# Altium PCB ALTAIR_PD_Soldier_V26.1c.PcbDoc (part 2 of 4)
Units mm, origin at the board's own origin, x right, y up, seen from the top; angles counter-clockwise.
Board outline 74 x 56 mm, 4 copper layers (Top Layer, Layer 1, Layer 2, Bottom Layer), stack 1.675 mm thick; 206 components, 124 nets, 616 pads, 540 vias.
Unrouted connection lines stored in the file: 139.
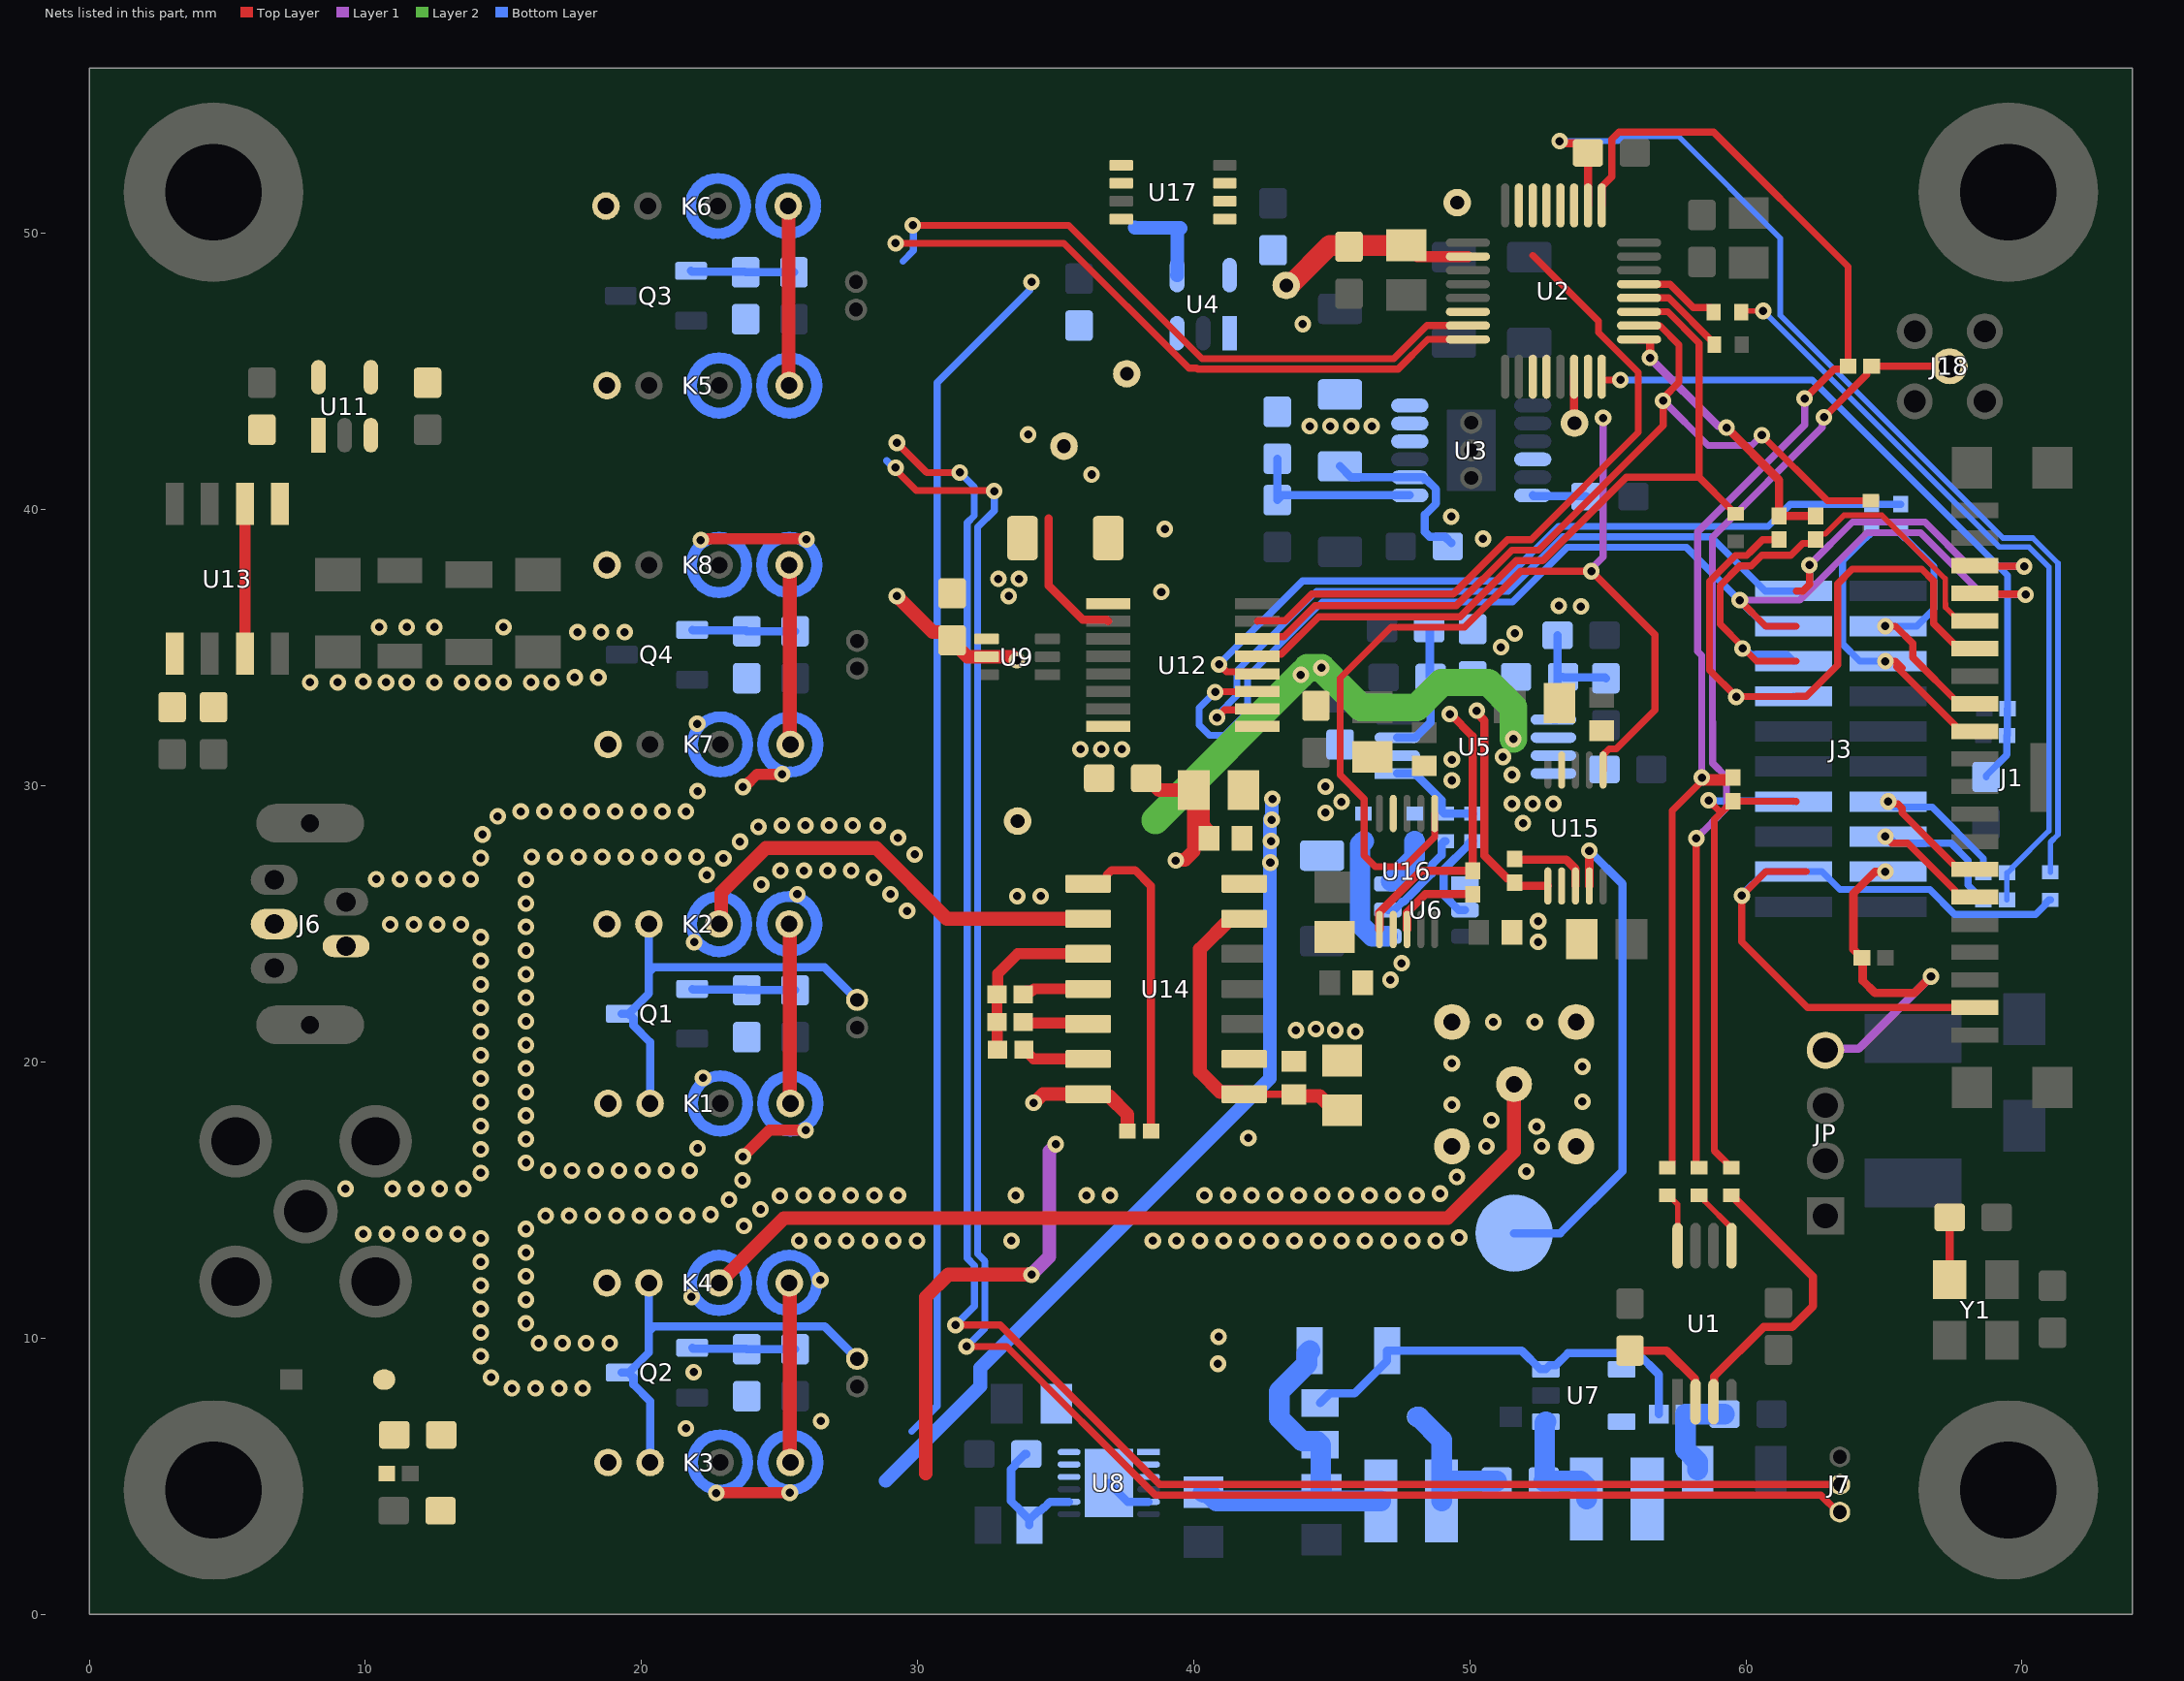
[diagram p4: the nets of this part, all layers, seen from the top]

## Part data
C00 C0: library part CAP, "Murata GRT188R61H105KE13D - Cap Ceramic 1uF 10% 50V X5R 0603 (Placeholder)", MF=Murata, MP=GRT188R61H105KE13D
C1 C2 C3 C4 C12 C23: library part CAP, "Murata GRT319R6YA106KE01D - Cap Ceramic 10uF 35V X5R 10% Pad SMD 1206 85C Automotive T/R", MF=Murata, MP=GRT319R6YA106KE01D
C5 C10 C11 C13 C22 C26 C27 C29 C32 C33 C35 C37 C39 C41 C43 C45 C47 C50 C51 C53 C54: library part CAP, "Kemet C0603C104K5RACAUTO - Cap Ceramic 0.1uF 50V X7R 10% 0603 125C Paper T/R", MF=Kemet, MP=C0603C104K5RACAUTO
C6 C8 C9 C15 C17 C25 C49: library part CAP, "Murata GRT188R61H105KE13D - Cap MLCC AEC-Q200 X5R 1uF 50V 0603", MF=Murata, MP=GRT188R61H105KE13D
C7 C14 C18 C19 C20 C24 C34 C36 C38 C40 C42 C44 C46 C48 C52: library part CAP, "Murata GRM21BR61E106KA73L - Cap Ceramic 10uF 10% 25V X5R 0805", MF=Murata, MP=GRM21BR61E106KA73L
C16: library part CAP, "Kemet C1206C331J5GACTU - Cap Ceramic 330pF 50V 5% NP0 1206", MF=Kemet, MP=C1206C331J5GACTU
C21: library part CAP, "Kemet C0805C475K8PACTU - Cap Ceramic 4.7uF 10V X5R 0805", MF=Kemet, MP=C0805C475K8PACTU
C28: library part CAP, "Murata GRT188R61H105KE13D - Cap MLCC AEEC-Q200 X5R 1uF 50V 0603", MF=Murata, MP=GRT188R61H105KE13D
C30: library part CAP, "Wurth Elektronik 885012008037 - Cap Ceramic 10pF 5% 50V NP0 1206", MF="Wurth Elektronik", MP=885012008037
C31: library part CAP, "Kemet C1206C301K5GACTU - Cap Ceramic 300pF 10% 50V NP0 1206", MF=Kemet, MP=C1206C301K5GACTU
C55 C56 C57 C58: library part CAP, "Cap, Nonpolar, Any, Must choose footprint manually"
D1: library part Schottky, "DIODE SCHOTTKY 20V 500MA SOD123", Average Rectified Current=500mA, Case/Package=SOD-123-2, Forward Voltage=385mV, Max Forward Surge Current (Ifsm)=5.5A, Max Operating Temperature=125°C, Max Repetitive Reverse Voltage (Vrrm)=20V, Max Reverse Leakage Current=250uA, Min Operating Temperature=-65°C, Package Quantity=3000, Contact Plating=Tin, Current Rating=500mA, Element Configuration=Single, Forward Current=500mA, Height=1.12mm, Lead Free="Lead Free", Length=2.69mm, Max Reverse Voltage (DC)=20V, Max Surge Current=5.5A, MF=onsemi, MP=MBR0520LT1G, Number of Pins=2, Output Current=500mA, Packaging="Tape and Reel", Peak Non-Repetitive Surge Current=5.5A, Peak Reverse Current=250uA, Polarity=Standard, Radiation Hardening=No, REACH SVHC="No SVHC", Termination=SMD/SMT, Voltage Rating (DC)=20V, Width=1.6mm
D2: library part LED-blue, "LED BLUE CLEAR 0603 SMD", Case Code (Imperial)=0603, Case Code (Metric)=1608, Color=Blue, Forward Current=30mA, Forward Voltage=3.2V, Max Operating Temperature=85°C, Min Operating Temperature=-40°C, Package Quantity=4000, Supplier Part Number 1=732-4966-1-ND, Test Current=20mA, Case/Package=0603, Category=LEDs, ComponentLink1Description=https://datasheet.ciiva.com/29563/150060bs75000-29563034.pdf?src-supplier=Digi-Key, ComponentLink1URL=https://datasheet.ciiva.com/29563/150060bs75000-29563034.pdf?src-supplier=Digi-Key, ComponentLink2Description=https://datasheet.ciiva.com/29279/759426-da-01-en-chipled-0603-w-kl-blau-150060bs75000-29279193.pdf?src-supplier=Conrad, ComponentLink2URL=https://datasheet.ciiva.com/29279/759426-da-01-en-chipled-0603-w-kl-blau-150060bs75000-29279193.pdf?src-supplier=Conrad, ComponentLink3Description=https://datasheet.ciiva.com/29563/150060bs75000-29563035.pdf?src-supplier=Digi-Key, ComponentLink3URL=https://datasheet.ciiva.com/29563/150060bs75000-29563035.pdf?src-supplier=Digi-Key, ComponentLink4Description=https://datasheet.ciiva.com/29563/150060bs75000-29563036.pdf?src-supplier=Digi-Key, ComponentLink4URL=https://datasheet.ciiva.com/29563/150060bs75000-29563036.pdf?src-supplier=Digi-Key, ComponentLink5Description=https://datasheet.ciiva.com/22656/1911343-22656939.pdf?src-supplier=Element14, ComponentLink5URL=https://datasheet.ciiva.com/22656/1911343-22656939.pdf?src-supplier=Element14, ComponentLink6Description=https://datasheet.ciiva.com/48430/150060bs75000-eng-tds-48430039.pdf?src-supplier=Distrelec, ComponentLink6URL=https://datasheet.ciiva.com/48430/150060bs75000-eng-tds-48430039.pdf?src-supplier=Distrelec, Dominant Wavelength=470nm, Height=0.7mm, Length=1.6mm, Lens Style=Clear,Rectangular, Luminous Intensity=145mcd, MF="Wurth Electronics", Mount="Surface Mount", MP=150060BS75000, Packaging="Cut Tape", REACH SVHC=Unknown, RoHS=Yes, Stock 1=66561, Supplier 1=Digi-Key, Viewing Angle=140°, Wavelength=470nm, Width=0.8mm
D3: library part Zener, "DIODE ZENER SOD123", MF=onsemi, MP=MMSZ4679T1G
D4: library part Zener, "Vishay SMAJ12A-M3/61 - TVS Diode 12V Standoff 13.3V Breakdown DO-214AC", MF="Vishay General Semiconductor", MP=SMAJ12A-M3/61
F1: library part Polyfuse, "Bel Fuse 0ZCG0030FF2C - Polymeric PTC Resettable Fuse 30V 300mA hold 600mA trip SMD 1812", MF="Bel Fuse Inc.", MP=0ZCG0030FF2C
H1 H2 H3 H4: "(Plated) Mounting hole"
J1: "20x1 Header SMD", Mouser Part Number=798-DF1920P1V52, Datasheet Link=https://www.hirose.com/en/product/document?clcode=CL0685-0037-0-52&productname=DF19-20P-1V(52)&series=DF19&documenttype=2DDrawing&lang=en&documentid=0001394451, Height=5.37mm, MF=Hirose, Mouser Price/Stock=https://www.mouser.co.uk/ProductDetail/Hirose-Connector/DF19-20P-1V52?qs=QNEnbhJQKvayaXitD7MtBA%3D%3D, MP=DF19-20P-1V(52)
J3: library part CLP-110-02-X-D, "10x2 Position Pin Connector 0.050 (1.27mm) Surface Mount, Gold; Alt parts FTSH-110-03-F-DV (thinner gold), FTSH-110-03-F-DV-P (thinner gold + pick and place)", MF=Samtec, MP=FTSH-110-03-L-DV
J4: "Coaxial, SMA Female Jack, 50 Ohm, Through-Hole", Mouser Part Number=710-60312002114503, Datasheet Link=https://katalog.we-online.de/em/datasheet/60312002114503.pdf, Height=9.56mm, MF="Wurth Elektronik", Mouser Price/Stock=https://www.mouser.co.uk/ProductDetail/Wurth-Elektronik/60312002114503?qs=3jNSNtuqJTL%2FGpZA1FAOxw%3D%3D, MP=60312002114503
J6: "Conn Mini-USB RCP 5 POS Solder ST Thru-Hole 5 Terminal 1 Port", Color=Black, Flammability Rating="UL94 V-0", Supplier Part Number 1=UE25BE5510H-ND, Category="USB Connectors", ComponentLink1Description=http://components.arrow.com/part/dataview/0323_00956300?src-supplier=Arrow+Europe, ComponentLink1URL=http://components.arrow.com/part/dataview/0323_00956300?src-supplier=Arrow+Europe, ComponentLink2Description=http://www.alliedelec.com/m/d/e7e3d7a920045eebbdef787e60d8b001.pdf?src-supplier=Allied+Electronics, ComponentLink2URL=http://www.alliedelec.com/m/d/e7e3d7a920045eebbdef787e60d8b001.pdf?src-supplier=Allied+Electronics, ComponentLink3Description=https://www.amphenolcanada.com/ProductSearch/drawings/AC/UE25BEX510X.pdf?src-supplier=Digi-Key, ComponentLink3URL=https://www.amphenolcanada.com/ProductSearch/drawings/AC/UE25BEX510X.pdf?src-supplier=Digi-Key, Contact Material="Copper Alloy", Contact Plating=Gold, Features="High Temperature", Gender=Female, Lead Free="Lead Free", MF="Amphenol Commercial", Mount="Through Hole", MP=UE25BE5510H, Number of Contacts=5, Number of Positions=5, RoHS=Yes, Stock 1=6446, Supplier 1=Digi-Key, Termination=PCB
J7: "3x1 Header SMD", Datasheet Link=https://www.mouser.com/datasheet/2/837/BC020-1948594.pdf, Height=3.2mm, MF="GCT (GLOBAL CONNECTOR TECHNOLOGY)", MP=BC020-03-A-0200-0300-L-G
J8: library part Pogo_Pad_NoGuard, "Pad for Pogo Pin without Guard"
J9 J10 J11 J12 J13: "Mill-Max Individual Insulated Pin 5.99mm Initial Height", MF=Mill-Max, MP=807-22-001-10-006101
J14 J15 J16 J19: library part "Jumper 2POS", "CONN HEADER VERT 2POS", Operating Temperature="-55°C ~ 125°C", Supplier Part Number 1=SAM1068-01-ND, MF="Samtec Inc.", MP=TSW-101-23-G-D, Supplier 1=Digi-Key
J17: library part MMCX_recp, "Conn MMCX F 50Ohm Solder ST SMD Gold Tray", Case/Package=SMA, Dielectric Material=PTFE, Housing Color=Gold, Manufacturer=Molex, Manufacturer Part Number=0734152061, Max Frequency=6GHz, Max Operating Temperature=165°C, Min Operating Temperature=-55°C, Package Quantity=1600, Supplier Part Number 1=WM5560-ND, Voltage Rating=170V, Body Material=Brass, Body Plating=Gold, Category="RF / Coaxial Connectors", ComponentLink1Description=https://datasheet.ciiva.com/30257/448910733910070-rf-coax-nectors-30257114.pdf?src-supplier=Onlinecomponents.com, ComponentLink1URL=https://datasheet.ciiva.com/30257/448910733910070-rf-coax-nectors-30257114.pdf?src-supplier=Onlinecomponents.com, ComponentLink2Description=https://datasheet.ciiva.com/5175/0733910070-rf-coax-connectors-173128-5175036.pdf?src-supplier=Mouser, ComponentLink2URL=https://datasheet.ciiva.com/5175/0733910070-rf-coax-connectors-173128-5175036.pdf?src-supplier=Mouser, ComponentLink3Description=https://datasheet.ciiva.com/15172/getdatasheetpartid-226633-15172901.pdf?src-supplier=Verical, ComponentLink3URL=https://datasheet.ciiva.com/15172/getdatasheetpartid-226633-15172901.pdf?src-supplier=Verical, ComponentLink4Description=https://datasheet.ciiva.com/9419/0733910070-rf-coax-connectors-9419351.pdf?src-supplier=Avnet, ComponentLink4URL=https://datasheet.ciiva.com/9419/0733910070-rf-coax-connectors-9419351.pdf?src-supplier=Avnet, ComponentLink5Description=https://datasheet.ciiva.com/16677/0733910070-rf-coax-connectors-16677276.pdf?src-supplier=Avnet+Europe, ComponentLink5URL=https://datasheet.ciiva.com/16677/0733910070-rf-coax-connectors-16677276.pdf?src-supplier=Avnet+Europe, ComponentLink6Description=https://datasheet.ciiva.com/15237/133380734152061-rf-coax-nectors-15237680.pdf?src-supplier=Arrow+Europe, ComponentLink6URL=https://datasheet.ciiva.com/15237/133380734152061-rf-coax-nectors-15237680.pdf?src-supplier=Arrow+Europe, ComponentLink7Description=https://datasheet.ciiva.com/18494/734152061-sd-18494866.pdf?src-supplier=Digi-Key, ComponentLink7URL=https://datasheet.ciiva.com/18494/734152061-sd-18494866.pdf?src-supplier=Digi-Key, ComponentLink8Description=https://datasheet.ciiva.com/3951/128690734152061-rf-coax-nectors-3951867.pdf?src-supplier=Arrow+Electronics, ComponentLink8URL=https://datasheet.ciiva.com/3951/128690734152061-rf-coax-nectors-3951867.pdf?src-supplier=Arrow+Electronics, Connector Type=PCB,SMA,Coaxial, Contact Material=Copper, Contact Plating=Gold, Depth=6.08mm, Fastening Type=Snap, Gender=Female, Halogen Free="Low Halogen", Impedance=50R, Insulation Material=Teflon, Lead Free="Lead Free", Length=6.08mm, MF=Molex, Mount="Through Hole", MP=0734152061, Orientation=Straight, Packaging=Bulk, Plating=Gold, Pricing 1="1=2.42000, 10=2.19800, 25=2.06320, 50=1.97360, 100=1.88390, 250=1.70448, 500=1.56992, 1000=1.34565, 2500=1.25594 (USD)", Radiation Hardening=No, REACH SVHC=Unknown, RoHS=Yes, Stock 1=31911, Supplier 1=Digi-Key, Termination=Solder
J18: library part CMP-207975-000001-3, "Rf Coaxial, Mmcx Jack, 50 Ohm, Pcb Rohs Compliant: Yes", Dielectric Material=PTFE, Insulation Resistance=1GΩ, Max Operating Temperature=155°C, Min Operating Temperature=-55°C, Voltage Rating=170V, Connector Type=MMCX, Contact Material="Gold, Nickel", Height=4.6mm, Impedance=50Ω, Insertion Loss (dB)=0.25dB, Insulation Material=PTFE, MF="Wurth Elektronik", MP=66012002111503, Number of Contacts=1, RoHS=Compliant
J_ACF J_IVC J_LED J_TIA: library part BC020-02-A-0200-0300-L-G, "2x1 Header SMD", Mouser Part Number=640-BC02002A02300LG, Datasheet Link=https://gct.co/connector/bc020, MF="GCT (GLOBAL CONNECTOR TECHNOLOGY)", Mouser Price/Stock=https://www.mouser.co.uk/ProductDetail/GCT/BC020-02-A-0200-0300-L-G?qs=KUoIvG%2F9IlakgsojlT9P9w%3D%3D, MP=BC020-02-A-0200-0300-L-G
JP: "4x1 Header SMD Partial Shroud", Mouser Part Number=571-440054-4, Arrow Part Number=440054-4, Arrow Price/Stock=https://www.arrow.com/en/products/440054-4/te-connectivity?utm_currency=USD&region=europe, Datasheet Link=https://www.te.com/commerce/DocumentDelivery/DDEController?Action=srchrtrv&DocNm=1-1773713-2_HPI_QRG_EN&DocType=Data%20Sheet&DocLang=English&PartCntxt=440054-4&DocFormat=pdf, Height=6.35mm, MF="TE Connectivity", Mouser Price/Stock=https://www.mouser.co.uk/ProductDetail/TE-Connectivity/440054-4?qs=JFPmFzpscO7310iGSDds%2FA%3D%3D, MP=440054-4
K1 K2 K3 K4 K5 K6 K7 K8: library part "RELAY 118-A-5/2D", "High coil resistance SIL/SIP Reed Relay 118-A-5/2D", MF=Pickering, MP=118-1-A-5/2D
L1 L2: library part IND, "TDK VLS3012CX-100M-1 - Inductor 10uH 20% 1.25A 0.324Ohm NonstandardPkg", Case Code (Imperial)=1210, Case Code (Metric)=3225, Current Rating=900mA, DC Resistance (DCR)=172.9mR, Inductance Tolerance=20%, Max Operating Temperature=105°C, Min Operating Temperature=-40°C, Package Quantity=1000, Resistor Type=Wirewound, Self Resonant Frequency=23MHz, Test Frequency=100kHz, Case/Package=1210, Core Material=Ferrite, DC Current=900mA, Depth=2.7mm, Halogen Free="Halogen Free", Height=2.5mm, Height - Seated (Max)=0.106inch, Inductance=10uH, Lead Free="Lead Free", Length=3.4mm, Max DC Current=900mA, MF="TDK Corporation", Military Standard=Not, Mount="Surface Mount", MP=VLS3012CX-100M-1, Number of Pins=2, Packaging="Tape and Reel", Radiation Hardening=No, Saturation Current=900mA, Series=CB, Shielding=Unshielded, Termination=SMD/SMT, Tolerance=20%, Width=0.098inch
Q1 Q2 Q3 Q4: library part "NMOS DMG2302UK", "DIODES INC. Power MOSFET, N Channel, 20 V, 2.8 A, 0.061 ohm, SOT-23, Surface Mount", Supplier Part Number 1=DMG2302UK-7DICT-ND, ComponentLink1Description=http://www.farnell.com/datasheets/2814387.pdf?src-supplier=Farnell, ComponentLink1URL=http://www.farnell.com/datasheets/2814387.pdf?src-supplier=Farnell, ComponentLink2Description=http://www.farnell.com/datasheets/2814387.pdf?src-supplier=Element14, ComponentLink2URL=http://www.farnell.com/datasheets/2814387.pdf?src-supplier=Element14, ComponentLink3Description=https://www.diodes.com/assets/Datasheets/DMG2302UK.pdf?src-supplier=Digi-Key, ComponentLink3URL=https://www.diodes.com/assets/Datasheets/DMG2302UK.pdf?src-supplier=Digi-Key, ComponentLink4Description=http://www.farnell.com/datasheets/2814387.pdf?src-supplier=Newark, ComponentLink4URL=http://www.farnell.com/datasheets/2814387.pdf?src-supplier=Newark, MF=Diodes, MP=DMG2302UK-7, Supplier 1=Digi-Key
R0 R3 R4 R8 R55 R65 R66 R99: library part RES, "Yageo RC0402JR-070RL - Res 0 Ohms 1/16W SMD 0402", MF=YAGEO, MP=RC0402JR-070RL
R1 R17 R21 R22 R60 R61: library part RES, "Vishay CRCW060310K0FKEA SMD 0603 10k, CRCW e3 Series, 75V, thick film, 100mW", MF="Vishay Dale", MP=CRCW060310K0FKEA
R2 R5 R11 R25 R26 R58 R59: library part RES, "Stackpole RMCF0402JT47R0 - Res 47Ohm 5% 0.063W 0402 Thick Film AEC-Q200 compliant", MF="Stackpole Electronics Inc.", MP=RMCF0402JT47R0
R6 R7 R9 R10 R12 R13: library part RES, "Stackpole RMCF0402JT47R0 - Res 47Ohm 5% 0.063W 0402 Thick Film AEC-Q200 compliant (Placeholder)", MF="Stackpole Electronics Inc.", MP=RMCF0402JT47R0
R14 R33 R47 R48 R49 R50: library part RES, "Vishay CRCW06030000Z0EA - Res 0 Ohms 1/8W SMD 0603", MF="Vishay Dale", MP=CRCW06030000Z0EA
R15: library part RES, "Panasonic ERA-3ARB104V - Res SMD 0603 0.1% 0.10W T.C. 10ppm 100K", MF="Panasonic Electronic Components", MP=ERA-3ARB104V
R16: library part RES, "Vishay MCT06030C2003FP500 - Res SMD 200kOhm 1% 1/10W 0603", MF="Vishay Dale", MP=MCT06030C2003FP500
R18: library part RES, "Panasonic ERJ-3EKF6800V - Res SMD 680 Ohm 1% 1/10W 0603", MF="Panasonic Electronic Components", MP=ERJ-3EKF6800V
R19 R36 R38 R39 R42 R69: library part RES, "Vishay CRCW060347R0JNEA - Res 47Ohm 5% 1/8W SMD 0603", MF="Vishay Dale", MP=CRCW060347R0JNEA
R20 R37 R40 R41 R43 R70: library part RES, "Panasonic ERJ-3GEYJ104V - Res 100k 5% 1/10W SMD 0603", MF="Panasonic Electronic Components", MP=ERJ-3GEYJ104V
R23: library part RES, "Vishay TNPW06032K32BEEA - Res 2.32k 0.1% 0.21W SMD 0603", MF="Vishay Dale", MP=TNPW06032K32BEEA
R24: library part RES, "KOA Speer RN73R1JTTD2231B25 - Res 2.23k 0.1% 1/10W SMD 0603", MF="KOA Speer Electronics, Inc.", MP=RN73R1JTTD2231B25
R27 R28: library part RES, "Yageo RL0402JR-070R1L - Res 0.1Ohm 5% 1/16W SMD 0402", MF=YAGEO, MP=RL0402JR-070R1L
R29: library part RES, "Panasonic ERA-6AEB303V - Res 30kOhm 0.1% 1/8W 0805", MF="Panasonic Electronic Components", MP=ERA-6AEB303V
R30: library part RES, "Yageo RC0402FR-071KL - Res 1kOhm 1% 1/16W 0402", MF=YAGEO, MP=RC0402FR-071KL
R31: library part RES, "Vishay TNPU12061K50BZEN00 - Res 1.5kOhm 0.1% 1/4W 1206", MF="Vishay Dale", MP=TNPU12061K50BZEN00
R32: library part RES, "Panasonic ERA-3AEB114V - Res 110k 0.1% 1/10W SMD 0603", MF="Panasonic Electronic Components", MP=ERA-3AEB114V
R34 R35: library part RES
R44 R51 R67 R68: library part RES, "Res, Any, Manually select footprint"
R45: library part RES, "Vishay TNPV12061M00BYEN - Res 1MOhm 0.1% 1/4W SMD 1206", MF="Vishay Dale", MP=TNPV12061M00BYEN
R46: library part RES, "Stackpole RNCF1206TKY10K0 - Res 10k 0.01% 1/4W SMD 1206", MF="Stackpole Electronics Inc.", MP=RNCF1206TKY10K0
R52 R53 R54: library part IMPEDANCE, "Yageo RC0402JR-070RL - Res 0 Ohms 1/16W SMD 0402", MF=YAGEO, MP=RC0402JR-070RL
R56 R57: library part RES, "Panasonic ERA-2AEB5111X - Res 5.11k 0.1% 1/16W SMD 0402", MF="Panasonic Electronic Components", MP=ERA-2AEB5111X
R62 R63 R64: library part RES, "Yageo RC0402FR-0733RL - Res 33Ohm 1% 1/16W 0402", MF=YAGEO, MP=RC0402FR-0733RL
RT1: library part "THERM_RES NTC 0603 10K 1%", "THERMISTOR NTC 10KOHM 3380K 0603", Case Code (Imperial)=0603, Case Code (Metric)=1608, Max Operating Temperature=125°C, Min Operating Temperature=-40°C, Supplier Part Number 1=490-16279-1-ND, Case/Package=0603, Category=Thermistors, ComponentLink1Description=http://www.farnell.com/datasheets/2095755.pdf?src-supplier=Farnell, ComponentLink1URL=http://www.farnell.com/datasheets/2095755.pdf?src-supplier=Farnell, ComponentLink2Description=https://www.murata.com/en-us/products/productdata/8796836233246/L0770E.pdf?src-supplier=Digi-Key, ComponentLink2URL=https://www.murata.com/en-us/products/productdata/8796836233246/L0770E.pdf?src-supplier=Digi-Key, ComponentLink3Description=http://www.farnell.com/datasheets/2095755.pdf?src-supplier=Element14, ComponentLink3URL=http://www.farnell.com/datasheets/2095755.pdf?src-supplier=Element14, MF=Murata, MP=NCU18XH103F60RB, REACH SVHC="No SVHC", RoHS=No, Stock 1=48580, Supplier 1=Digi-Key
U1: "LVCMOS CLOCK BUFFER 3-CHANNEL", MF="Texas Instruments", MP=LMK1C1103PWR
U2: "24BIT ADC Delta-Sigma 4k samples/s PGA V-reference", Case/Package=LQFP, Max Operating Temperature=125°C, Min Operating Temperature=-50°C, Supplier Part Number 1=296-45170-1-ND, Category="Analog to Digital Converters (ADCs)", ComponentLink1Description=http://www.ti.com/general/docs/lit/getliterature.tsp?genericPartNumber=ADS124S08&fileType=pdf&src-supplier=Farnell, ComponentLink1URL=http://www.ti.com/general/docs/lit/getliterature.tsp?genericPartNumber=ADS124S08&fileType=pdf&src-supplier=Farnell, ComponentLink2Description=http://www.ti.com/lit/ds/symlink/ads124s06.pdf?src-supplier=Digi-Key, ComponentLink2URL=http://www.ti.com/lit/ds/symlink/ads124s06.pdf?src-supplier=Digi-Key, Interface=SPI, MF="Texas Instruments", Mount="Surface Mount", MP=ADS124S08IPBSR, Number of A/D Converters=1, Number of Bits=24, Number of Inputs=12, Number of Pins=32, Packaging="Tape and Reel", RoHS=No, Sampling Rate=4000S/s, Stock 1=2523, Supplier 1=Digi-Key
U3: "20V 500mA Ultralow Noise Ultrahigh PSRR Adjustable Linear Regulator 260V Dropout MSOP-12", Case/Package=MSOP, Dropout Voltage=260mV, Max Operating Temperature=125°C, Min Current Limit=570mA, Min Operating Temperature=-40°C, Output Current=500mA, Output Voltage=15V, Supplier Part Number 1=LT3045EMSE#PBF-ND, ComponentLink1Description=http://www.farnell.com/datasheets/2163219.pdf?src-supplier=Farnell, ComponentLink1URL=http://www.farnell.com/datasheets/2163219.pdf?src-supplier=Farnell, ComponentLink2Description=http://www.linear.com/docs/55649?src-supplier=Digi-Key, ComponentLink2URL=http://www.linear.com/docs/55649?src-supplier=Digi-Key, MF="Analog Devices / Linear Technology", MP=LT3045EMSE#PBF, Number of Regulators=1, RoHS=Yes, Stock 1=1588, Supplier 1=Digi-Key
U4 U11: library part ADP7142AUJZ-R7, "1.2-40V 200mA Low Noise CMOS LDO Adjustable Linear Regulator TSOT23", Ambient Temperature Range High=+125°C, Ambient Temperature Range Low=-40°C, Dropout Voltage=200mV, Manufacturer="Analog Devices", Max Junction Temp=+150°C, Max Supply Voltage=40V, Min Supply Voltage=2.7V, Nominal Supply Current=50-180uA, Output Current=200mA, Output Voltage=1.2-5V, Package=UJ-5, Temperature="-40°C to +125°C", Accuracy Percentage=0.8%, Automotive=No, Category=IC, ComponentLink2Description=Datasheet, ComponentLink2URL=https://www.analog.com/media/en/technical-documentation/data-sheets/ADP7142.pdf, Device Class L1="Integrated Circuits (ICs)", Device Class L2="Power Management ICs", Device Class L3="Voltage Regulators - Linear", Digikey Description="IC REG LIN POS ADJ 200MA TSOT23", Height=1mm, Lead Free=Yes, Manufacturer Part Number=ADP7142AUJZ-R7, MF="Analog Devices", Mouser Description="LDO Regulator Pos 1.5V to 5V 0.2A 5-Pin TSOT-23 T/R", MP=ADP7142AUJZ-5.0-R7, Number of Outputs=1, Octopart=https://octopart.com/adp7142aujz-r7-analog+devices-38928114, Output Type=AdjustableProgrammable, RoHS=TRUE, Temperature Range High=+125°C, Temperature Range Low=-40°C
U5: library part OPA2182IDBV, "Op amp, 2 Channel, Highest-precision, 36-V, 5-MHz, single, low-noise, zero-drift, MUX-friendly amplifier 8VSSOP -40 to 125", MF="Texas Instruments", MP=OPA2182IDGKR
U6: "BJT Array, 1NPN 1PNP, VCE(sat) 375mV, hFE 300, Breakdown 30V, 6-SOT-23", MF="Diodes Incorporated", MP=ZXTC2045E6TA
U7: library part LM2611AMF, "1.4MHz Cuk Converter, 5-pin SOT-23, Pb-Free", PackageTopMarking=S40A*XTT, PowerWise=N, ComponentLink1Description="Datasheet URL", ComponentLink1URL=http://www.ti.com/general/docs/lit/getliterature.tsp?genericPartNumber=LM2611&fileType=pdf, CompType=Switcher, MF="Texas Instruments", MP=LM2611AMF/NOPB, PackageDescription="Molded SOT-23, .115 x .063 x .040 in Body, 5 Lead, .0375 in Pitch", PackageReference=DBV0005A, PinCount=5, RoHS=Y
U8: "-20V 500mA Ultralow Noise Ultrahigh PSRR Adjustable Negative Linear Regulator 12DFN", MF="Analog Devices", MP=LT3094EDD#PBF, RoHS Compliant=Yes
U9: "DAC 8bit 1 channel SPI Supply Reference Buffered Voltage", MF="Texas Instruments", MP=DAC5311IDCKR
U10: library part REF5050IDGKR, "2.5V±0.05% Voltage Reference 8VSSOP", Case/Package=VSSOP, Max Input Voltage=18V, Max Operating Temperature=125°C, Max Output Current=10mA, Max Output Voltage=5V, Min Input Voltage=5.2V, Min Operating Temperature=-40°C, Nominal Supply Current=800uA, Operating Supply Current=1.2mA, Package Quantity=1, Supplier Part Number 1=296-27505-1-ND, Temperature Coefficient=3ppm/°C, Tolerance=0.05%, Category="Voltage References", ComponentLink1Description=https://datasheet.ciiva.com/2007/ref5020-2007532.pdf?src-supplier=Digi-Key, ComponentLink1URL=https://datasheet.ciiva.com/2007/ref5020-2007532.pdf?src-supplier=Digi-Key, ComponentLink2Description=https://datasheet.ciiva.com/14197/ref5050-14197084.pdf?src-supplier=Avnet, ComponentLink2URL=https://datasheet.ciiva.com/14197/ref5050-14197084.pdf?src-supplier=Avnet, ComponentLink3Description=https://datasheet.ciiva.com/2007/ref5020-2007533.pdf?src-supplier=Digi-Key, ComponentLink3URL=https://datasheet.ciiva.com/2007/ref5020-2007533.pdf?src-supplier=Digi-Key, ComponentLink4Description=https://datasheet.ciiva.com/2007/ref5020-2007534.pdf?src-supplier=Digi-Key, ComponentLink4URL=https://datasheet.ciiva.com/2007/ref5020-2007534.pdf?src-supplier=Digi-Key, ComponentLink5Description=https://datasheet.ciiva.com/41462/001014471-da-01-en-ic-vref-series-ref5050idgkr-vssop-8-tid-41462326.pdf?src-supplier=Conrad, ComponentLink5URL=https://datasheet.ciiva.com/41462/001014471-da-01-en-ic-vref-series-ref5050idgkr-vssop-8-tid-41462326.pdf?src-supplier=Conrad, Lead Free="Lead Free", MF="Texas Instruments", Min Output Voltage=5V, MP=REF5025IDGKR, Number of Channels=1, Number of Pins=8, Output Current=10mA, Output Type=Fixed, Output Voltage=5V, Packaging="Tape and Reel", Pricing 1="1=6.18000, 10=5.58100, 25=5.32200, 100=4.41320, 250=4.02380, 500=3.76420, 1000=3.45268 (USD)", Quiescent Current=800uA, Radiation Hardening=No, Reference Type=Series, RoHS=Yes, Stock 1=2539, Supplier 1=Digi-Key, Weight=0.00067oz
U12: "Digital Isolator 6-Channel 6/0 Inputs 16SSOP", MF="Texas Instruments", MP=ISO7760DBQR
U13: "Op Amp, 36V, fA input, precision, e-trim", Mouser Part Number=595-OPA928DR, Arrow Part Number=OPA928DR, Arrow Price/Stock=null?region=nac, Datasheet Link=https://www.ti.com/lit/ds/symlink/opa928.pdf?HQS=dis-mous-null-mousermode-dsf-pf-null-wwe&ts=1731036524091&ref_url=https%253A%252F%252Fwww.ti.com%252Fgeneral%252Fdocs%252Fsuppproductinfo.tsp%253FdistId%253D26%2526gotoUrl%253Dhttps%253A%252F%252Fwww.ti.com, Height=1.75mm, MF="Texas Instruments", Mouser Price/Stock=https://www.mouser.co.uk/ProductDetail/Texas-Instruments/OPA928DR?qs=2wMNvWM5ZX5RgAZJHoeYSw%3D%3D, MP=OPA928DR
U14: library part IVC102/SO_5, "Precision Switched Integrator Transimpedance Amplifier", MF="Texas Instruments", MP=IVC102/SO
U15 U16: "Programmable Gain Amplifier - Single Channel, Precision, -13 to 14 Gain Selectable Operational Amplifier, 0.56 MHz Typical GBW, 0.12 V/us Typical SR, 2.4 to 40 V, 10-Pin SOP (MS-10), Industial, Pb-Free, Reel", Linear Technology Part Number=LT1991, Channels (#)=1, ComponentLink1Description="Manufacturer URL", ComponentLink1URL=http://www.linear.com/, ComponentLink2Description=Datasheet, ComponentLink2URL=http://cds.linear.com/docs/en/datasheet/1991fh.pdf, ComponentLink3Description="Package Specification", ComponentLink3URL=http://cds.linear.com/docs/en/packaging/MSOP_10_05-08-1661.pdf, DatasheetVersion="Rev. H", GBW (MHz) Typical=0.56, Is (mA) Typical=0.1, MF="Linear Technology", Mounting Technology="Surface Mount", MP=LT1991IMS#TRPBF, PackageDescription="10-Lead Plastic MSOP, Body 3 x 3 mm, Pitch 0.5 mm", PackageReference=LT-MS-10, PackageVersion="Rev E", Packing=Reel, RevisionNote="URLs updated", RoHS=Pb-Free, SR (V/us) Typical=0.12, Type=SGA, Vos (mV) Guaranteed=0.05, Vos (mV) Typical=0.015, Vs Max (V)=40, Vs Min (V)=2.4
U17: library part CMP-0859-00546-3, "2-Line-to-4-Line Decoder, DCT0008A, SMALL T&R", F @ Nom Voltage(Max)(Mhz)=150, Generic Part Number=SN74LVC1G139, ICC @ Nom Voltage(Max)(mA)=0.01, Manufacturer="Texas Instruments", Operating Temperature Range(C)="-40 to 85", Rating=Catalog, tpd @ Nom Voltage(Max)(ns)=16.5,7.5,4.9,3.6, Voltage(Nom)(V)=1.8,2.5,3.3,5, 3-State Output=No, Bits(#)=1, DatasheetVersion=SCES602C, Input Type=CMOS/TTL, Logic=True, Output Drive (IOL/IOH)(Max)(mA)=32/-32, Output Type=CMOS, PackageReference=DCT0008A, Schmitt Trigger=No, Specialty Logic Family=Decoder/Encoder/Multiplexer, Sub-Family=Decoder/Encoder/Multiplexer, Technology Family=LVC, VCC(Max)(V)=5.5, VCC(Min)(V)=1.65
Y1: "MEMS OSC XO 4.096MHZ H/LVCMOS", Case/Package=SMD/SMT, Max Supply Current=4.5mA, Height=0.032inch, MF=SiTime, Mount="Surface Mount", MP=SiT1602BC-21-XXN-4.096000, RoHS Compliant=Yes, Series=SIT1602, Width=0.098inch

## Via types
v1: diameter 0.6, hole 0.3, Top Layer to Bottom Layer, tented both sides, 212 vias
v2: diameter 0.6, hole 0.3, Top Layer to Bottom Layer, 206 vias
v3: diameter 0.8, hole 0.5, Top Layer to Bottom Layer, 122 vias

## Nets (pads, with @x,y where several pads share a name; then routed paths per layer and width w, separated by ;. In a path a pad name is that pad's centre, name@x,y a point inside that pad or via, vN(x,y) a via of type N, cw(c..) or ccw(c..) an arc to the next point about the centre after c; other vN are vias at no path point)
4V9: C0.1 C00.1 C12.2 C13.2 C22.1 C23.1 C27.1 C33.1 C34.1 C35.1 C36.1 D3.2 R27.1 R28.1 R55.2 R68.1 TP4.1 U5.2 U9.5 U12.9 U13.1 U14.7 U14.8 U14.13 | length 44.1
  Top Layer w0.254: U14.8@41.825,18.84 41.832,18.833 C35.1@43.617,18.833
  Top Layer w0.5: v1@29.269,36.856 30.55,35.575 31,35.575 31.25,35.325 C22.1@31.25,35.275 ; 30.299,5.099 30.299,11.488 31.111,12.3 v1(34.125,12.3) ; C22.1@31.25,35.225 31.8,34.675 U9.5@32.5,34.675 33.448,34.675 33.573,34.55 v1(33.6,34.55) ; v1(34.2,18.525) 34.227,18.525 34.542,18.84 U14.7@36.175,18.84 36.25,18.765 36.935,18.765 37.6,18.1 R55.2@37.6,17.5 ; C27.1@38.275,30.275 38.325,30.275 38.75,29.85 C34.1@40,29.85 ; v1(39.35,27.3) 39.369,27.319 39.676,27.319 40,27.643 C34.1@40,29.85 ; C33.1@40.55,28.275 40.55,28.35 40.325,28.575 40.325,29.525 C34.1@40,29.85 ; U14.8@41.825,18.84 41.75,18.915 40.96,18.915 40.225,19.65 40.225,24.09 41.325,25.19 U14.13@41.825,25.19 ; C35.1@43.617,18.833 C35.1@43.625,18.825 43.679,18.771 44.554,18.771 45.075,18.25 C36.1@45.225,18.25
  Layer 1 w0.5: v1(34.125,12.3) 34.775,12.95 34.775,16.773 35,16.998 v1(35,17.025)
  other v1: 41.975,17.25 44.775,29.025 45.35,29.425 44.775,29.975 29.25,36.875 38.825,37.025 38.95,39.3 36.3,41.275 34,42.725 -2.025,62.7 -2.45,64.8
5VTIA: C25.2 C28.2 C29.2 U11.4 U11.5 U13.5 | length 3.7
  Top Layer w0.75: -5.812,66.355 -5.812,67.588 -5.325,68.075 -5.275,68.075 -5.262,68.088 -5.262,69.788 -5.25,69.8
10V: C4.2 C5.1 C7.2 C9.2 C22.2 C23.2 C27.2 C33.2 C34.2 C37.2 C38.2 C41.2 C42.2 C49.2 J_LED.1 R16.2 R21.1 R23.2 TP1.1 U3.10 U3.11 U3.12 U5.8 U6.1 U9.4 U10.2 U11.1 U11.3 U12.16 U14.14 U15.7 U16.7 | length 30.6
  Bottom Layer w0.5: 28.847,4.833 32.273,8.259 32.273,8.923 42.756,19.406 42.756,27.225 42.756,28 42.756,28.804 42.831,28.879 42.831,29.506 v1(42.85,29.525) ; J_LED.1@37.15,-5.375 J_LED.1@37.192,-5.417
  other v1: 47.125,22.975 47.525,23.575 52.475,24.35 52.475,25.1 42.775,27.225 42.8,28 51.925,28.65 42.825,28.775 51.525,29.35 52.275,29.35 53.025,29.35 35.9,31.325 36.65,31.325 37.4,31.325 51.125,35.025 51.625,35.525 33.3,36.875 32.925,37.5 33.675,37.5 44.2,43.025 44.95,43.025 45.7,43.025 46.45,43.025
-11V: C20.1 C35.2 C36.2 C39.2 C40.2 C43.2 C44.2 TP5.1 U8.10 U8.11 U8.12 U14.9 U15.4 U16.4
  other v1: 40.875,9.075 40.9,10.05 45.85,21.1 43.7,21.15 45.125,21.15 44.425,21.2 49.35,30.2 49.35,30.95 54.025,36.5 53.225,36.525
-11V_EN: R38.1 R41.1 U8.3
-16V: C16.1 C18.1 C19.1 L2.2 R29.2 U8.1 U8.2 U8.5 U8.13 | length 14.7
  Bottom Layer w0.3: U8.13@36.925,4.75 37.6,4.075 U8.5@38.366,4.075
  Bottom Layer w0.75: C19.1@40.35,4.425 40.5,4.425 40.825,4.1 L2.2@46.775,4.1 ; C16.1@44.2,9.55 44.1,9.45 44.1,9.075 43.1,8.075 43.1,7.1 43.925,6.275 44.45,6.275 44.6,6.125 44.6,4.525 C18.1@44.625,4.5
-16V_EN: R69.1 R70.1 U7.4
\DRDY1: J1.15 J3.16 R3.1 | length 9.1
  Top Layer w0.254: v1(65.05,28.165) 65.291,27.924 65.858,27.924 67.568,26.214 67.568,26.123 67.716,25.975 J1.15@68.291,25.975
  Bottom Layer w0.254: J3.16@65.152,28.165 65.393,27.924 67.426,27.924 68.046,27.304 68.046,26.404 68.575,25.875 R3.1@68.6,25.875
\DRDY2: J1.14 J3.14 R4.1 | length 9
  Top Layer w0.254: v1@65.225,29.35 65.503,29.35 65.66,29.194 65.66,29.02 67.556,27.123 68.143,27.123 J1.14@68.291,26.975
  Bottom Layer w0.254: v1(65.152,29.435) 65.355,29.231 66.744,29.231 68.6,27.375 R4.1@68.6,26.85
\SPI_CS1: J1.6 J3.07 R12.1 | length 24.2
  Top Layer w0.254: R12.1@61.2,38.925 61.193,38.918 60.602,38.918 60.179,38.495 60.03,38.346 59.622,38.346 58.681,37.405 58.681,34.194 v1(59.65,33.225) 59.66,33.235 61.814,33.235 61.824,33.245 62.192,33.245 63.321,34.373 63.321,37.321 63.85,37.85 66.37,37.85 66.8,37.42 66.8,35.875 67.552,35.123 68.143,35.123 J1.6@68.291,34.975
  Bottom Layer w0.254: v1(59.65,33.225) 59.66,33.235 61.713,33.235 J3.07@61.723,33.245
\SPI_CS2: J1.5 J3.05 R13.1 | length 19.1
  Top Layer w0.2: R13.1@62.6,39.025 62.7,39.125 62.875,39.125 63.552,39.802 64.919,39.802 67.214,37.507 67.214,36.606 67.225,36.595 67.225,36.466 67.716,35.975 J1.5@68.291,35.975
  Top Layer w0.254: 61.824,34.515 61.819,34.52 60.383,34.52 59.928,34.975 v1(59.875,34.975) 59.875,35.047 59.062,35.86 59.062,37.248 59.779,37.965 60.188,37.965 60.573,38.35 61.625,38.35 62.06,38.785 62.385,38.785 R13.1@62.525,38.925
  Bottom Layer w0.254: v1(59.875,34.975) 59.969,34.975 60.187,34.756 61.482,34.756 J3.05@61.723,34.515
\SPI_CS3: J1.9 J3.06 R9.1 | length 10.9
  Top Layer w0.254: v1(65.05,34.515) 65.418,34.515 65.66,34.274 ; 65.456,34.312 67.568,32.2 67.568,32.123 67.716,31.975 J1.9@68.291,31.975
  Bottom Layer w0.254: R9.1@64.5,39.15 64.5,39.125 64.352,38.977 64.327,38.977 63.501,38.151 63.501,35.137 64.123,34.515 v1(65.05,34.515) J3.06@65.152,34.515
\SPI_CS4: J1.8 J3.04 R10.1 | length 9.9
  Top Layer w0.254: v1(65.05,35.785) 65.418,35.785 66.041,35.163 66.041,34.651 67.716,32.975 J1.8@68.291,32.975
  Bottom Layer w0.254: J3.04@65.152,35.785 66.18,35.785 66.803,36.407 66.803,37.948 65.773,38.977 65.748,38.977 65.6,39.125 R10.1@65.6,39.15
\SYS_RESET: J1.19 J3.17 R2.1 | length 26.2
  Top Layer w0.254: 62.192,26.895 60.72,26.895 v1(59.85,26.025) 59.85,24.35 62.225,21.975 J1.19@68.291,21.975
  Bottom Layer w0.254: v1(59.85,26.025) 59.85,26.051 60.694,26.895 62.752,26.895 63.399,26.247 66.654,26.247 67.555,25.346 70.496,25.346 70.852,25.702 70.852,25.752 70.975,25.875 R2.1@71.025,25.875
A2V5: C52.2 C53.1 TP10.1 U2.7 U2.30 U10.6 U15.1 U16.1 | length 36.3
  Top Layer w0.254: U16.1@48.725,29 48.725,28.15 47.65,27.075 46.575,27.075 46.172,27.478 46.172,29.528 45.3,30.4 45.3,33.9 47.144,35.744 49.808,35.744 51.839,37.775 v1(54.4,37.775) 56.7,35.475 56.7,32.741 55.299,31.34 55.044,31.34 54.825,31.121 U15.1@54.825,30.575
  Layer 1 w0.254: v1(54.4,37.775) 54.4,37.869 54.825,38.294 v1(54.825,43.325)
A5VSW: C26.2 K1.1 K2.1 K3.1 K4.1 K5.1 K6.1 K7.1 K8.1 TP3.1 U5.6 U5.7 U12.1 | length 17.7
  Layer 2 w1: 38.605,28.755 v1(43.875,34.025) 44.125,34.275 v1(44.625,34.275) 46.058,32.842 48.075,32.842 48.977,33.745 50.672,33.745 51.575,32.842 v1(51.575,31.7)
  other v1: 51.525,30.4 51.2,31.05
ACF_ADCIN: C56.2 R51.2 U2.3
ACF_LVLAMP_OUT: J_ACF.1 R51.1 R56.2 U15.6 | length 8.1
  Top Layer w0.3: v1(50.25,32.725) 50.25,32.644 50.527,32.367 50.527,27.473 51.35,26.65 51.5,26.65 R56.2@51.625,26.525 ; R56.2@51.625,26.375 U15.6@52.825,26.375
  other v1: 49.325,39.75
ACF_RELAY_GND: J15.2 K3.2 K4.2 Q2.3 | length 15.5
  Bottom Layer w0.3: Q2.3@19.285,8.75 Q2.3@19.535,8.75 ; K4.2@20.27,12 20.27,10.25 ; K3.2@20.31,5.5 20.31,7.725 19.71,8.325 19.71,8.575 Q2.3@19.535,8.75 ; J15.2@27.81,9.25 26.633,10.427 20.447,10.427 20.27,10.25 ; Q2.3@19.535,8.75 20.27,9.485 20.27,10.25
ACF_SWA_IN: J9.1 K4.3 | length 33.2
  Top Layer w0.5: K4.3@22.81,12 25.16,14.35 49.2,14.35 51.6,16.75 J9.1@51.6,19.2
ADC_CLK: J3.13 R62.1 R65.2 | length 19.9
  Top Layer w0.254: v1(58.65,29.475) 59.1,29.025 ; R62.1@59.475,16.175 58.85,16.8 58.85,28.775 59.1,29.025 ; 61.824,29.435 61.817,29.442 59.532,29.442 R65.2@59.525,29.45 59.525,29.425 59.377,29.277 59.352,29.277 59.1,29.025
  Bottom Layer w0.254: v1(58.65,29.475) 58.67,29.455 61.703,29.455 J3.13@61.723,29.435
AVDD: C8.2 C45.2 C46.2 C54.2 R34.2 R35.2 TP2.1 U2.26 U3.4 U4.4 U4.5 U17.8 | length 10.6
  Top Layer w0.3: C46.2@47.7,49.575 C46.2@48.104,49.171
  Top Layer w0.4: C46.2@48.104,49.171 U2.26@49.929,49.171
  Top Layer w0.75: TP2.1@43.475,48.125 44.925,49.575 C46.2@47.7,49.575
  Bottom Layer w0.5: 37.871,50.221 37.883,50.209 39.508,50.209 39.521,50.196 39.402,50.077 39.402,48.503 U4.4@39.396,48.496
DIG_GND: J3.18 JP.4 R99.2 | length 12.6
  Top Layer w0.3: R99.2@64.2,23.775 64.175,23.775 64.05,23.9 64.05,23.925 63.893,24.082 63.893,26.106 64.682,26.895 v1(65.05,26.895) ; R99.2@64.225,23.775 64.225,22.95 64.675,22.5 66.1,22.5 v1(66.7,23.1)
  Layer 1 w0.3: JP.4@62.875,20.425 62.931,20.481 64.081,20.481 v1(66.7,23.1)
GPIO_DECODERA: U2.21 U17.1
GPIO_DECODERB: U2.20 U17.2
GUARD: J6.4 J10.1 J11.1 J12.1 J13.1 U13.2 U13.7 | length 122.3
  Top Layer w0.4: -6.588,61.7 -4.834,61.7 -4.6,61.934 -4.6,63.225 -5.19,63.815 ; v1(-1.675,63.9) -1.637,63.862 -0.435,63.862 -0.388,63.815 ; U13.7@5.635,34.788 U13.2@5.635,40.212 ; v2(22.148,38.901) 22.187,38.939 22.4,38.939 22.415,38.954 25.945,38.954 v2(25.97,38.928) ; v2(22.709,4.393) 22.715,4.399 25.365,4.399 v2(25.37,4.404) ; v2(23.67,16.571) 24.63,17.531 v2(25.943,17.531) ; v2(23.67,29.963) 23.724,29.963 24.184,30.424 v2(25.097,30.424)
  Bottom Layer w0.4: 23.77,51 ccw(c22.77,51) 23.77,51 ; 23.81,12 ccw(c22.81,12) 23.81,12 ; 23.81,25 ccw(c22.81,25) 23.81,25 ; 23.81,38 ccw(c22.81,38) 23.81,38 ; 23.81,44.5 ccw(c22.81,44.5) 23.81,44.5 ; 23.85,5.5 ccw(c22.85,5.5) 23.85,5.5 ; 23.85,18.5 ccw(c22.85,18.5) 23.85,18.5 ; 23.85,31.5 ccw(c22.85,31.5) 23.85,31.5 ; 26.31,51 ccw(c25.31,51) 26.31,51 ; v2@26.35,12 ccw(c25.35,12) v2@26.35,12 ; 26.35,25 ccw(c25.35,25) 26.35,25 ; 26.35,38 ccw(c25.35,38) 26.35,38 ; 26.35,44.5 ccw(c25.35,44.5) 26.35,44.5 ; 26.39,5.5 ccw(c25.39,5.5) 26.39,5.5 ; 26.39,18.5 ccw(c25.39,18.5) 26.39,18.5 ; 26.39,31.5 ccw(c25.39,31.5) 26.39,31.5
  other v1: 50.6,16.95 52.6,16.95 49.35,18.45 54.075,18.565 54.075,19.835 49.35,19.95 50.85,21.45 52.35,21.45
  other v2: 21.607,6.734 26.5,7 15.309,8.18 16.163,8.18 17.017,8.18 17.871,8.18 14.554,8.58 21.891,8.768 14.18,9.348 16.284,9.82 17.138,9.82 17.992,9.82 18.846,9.82 14.18,10.202 15.82,10.537 14.18,11.056 15.82,11.391 21.813,11.496 14.18,11.91 26.478,12.107 15.82,12.245 14.18,12.764 15.82,13.099 25.709,13.53 26.563,13.53 27.417,13.53 28.271,13.53 29.125,13.53 29.979,13.53 33.395,13.53 38.519,13.53 39.373,13.53 40.227,13.53 41.081,13.53 41.935,13.53 42.789,13.53 43.643,13.53 44.497,13.53 45.351,13.53 46.205,13.53 47.059,13.53 47.913,13.53 48.767,13.53 14.18,13.618 49.613,13.646 9.924,13.77 10.778,13.77 11.632,13.77 12.486,13.77 13.34,13.77 15.82,13.953 23.711,14.06 16.528,14.43 17.382,14.43 18.236,14.43 19.09,14.43 19.944,14.43 20.798,14.43 21.652,14.43 22.504,14.48 24.315,14.664 23.172,15.013 25.016,15.152 25.87,15.17 26.724,15.17 27.578,15.17 28.432,15.17 29.286,15.17 33.556,15.17 36.118,15.17 36.972,15.17 40.388,15.17 41.242,15.17 42.096,15.17 42.95,15.17 43.804,15.17 44.658,15.17 45.512,15.17 46.366,15.17 47.22,15.17 48.074,15.17 48.925,15.234 9.276,15.41 10.984,15.41 11.838,15.41 12.692,15.41 13.546,15.41 23.654,15.717 49.529,15.838 14.18,15.982 52.049,16.04 16.626,16.07 17.48,16.07 18.334,16.07 19.188,16.07 20.042,16.07 20.896,16.07 21.75,16.07 15.82,16.351 14.18,16.836 22.03,16.876 15.82,17.205 52.42,17.663 14.18,17.69 50.78,17.899 15.82,18.059 14.18,18.544 15.82,18.913 14.18,19.398 22.23,19.428 15.82,19.767 14.18,20.252 15.82,20.621 14.18,21.106 15.82,21.475 14.18,21.96 15.82,22.329 14.18,22.814 15.82,23.183 14.18,23.668 15.82,24.037 21.909,24.338 14.18,24.522 15.82,24.891 10.898,24.98 11.752,24.98 12.606,24.98 13.46,24.98 29.619,25.472 15.82,25.745 33.607,26.01 34.461,26.01 25.643,26.076 29.015,26.076 24.34,26.431 15.82,26.599 10.396,26.62 11.25,26.62 12.104,26.62 12.958,26.62 13.812,26.62 28.411,26.68 22.362,26.771 25.033,26.93 25.887,26.93 26.741,26.93 27.595,26.93 14.18,27.39 22.966,27.375 16.017,27.43 16.871,27.43 17.725,27.43 18.579,27.43 19.433,27.43 20.287,27.43 21.141,27.43 21.995,27.43 29.892,27.517 23.569,27.979 29.288,28.121 14.242,28.242 24.234,28.515 28.555,28.559 25.086,28.57 25.94,28.57 26.794,28.57 27.648,28.57 14.793,28.894 15.629,29.07 16.483,29.07 17.337,29.07 18.191,29.07 19.045,29.07 19.899,29.07 20.753,29.07 21.607,29.07 22.03,29.812 22.018,32.252 8,33.75 9,33.75 10.75,33.75 11.5,33.75 12.5,33.75 13.5,33.75 14.25,33.75 15,33.75 16,33.75 16.75,33.75 9.925,33.775 17.583,33.93 18.437,33.93 17.683,35.57 18.537,35.57 19.391,35.57 10.5,35.75 11.5,35.75 12.5,35.75 15,35.75
IVC_ADCIN: C57.2 R67.2 U2.4
IVC_LVLAMP_OUT: J_IVC.1 R57.2 R67.1 U16.6 | length 10.6
  Top Layer w0.3: U16.6@46.725,24.8 46.725,25.419 48.231,26.925 R57.2@50.1,26.925 50.1,31.8 49.3,32.6 v1(49.275,32.6)
  other v1: 50.475,38.95
IVC_RELAY_GND: J14.2 K1.2 K2.2 Q1.3 | length 15.5
  Bottom Layer w0.3: Q1.3@19.285,21.75 Q1.3@19.535,21.75 ; K2.2@20.27,25 20.27,23.25 ; K1.2@20.31,18.5 20.31,20.725 19.71,21.325 19.71,21.575 Q1.3@19.535,21.75 ; J14.2@27.81,22.25 26.633,23.427 20.447,23.427 20.27,23.25 ; Q1.3@19.535,21.75 20.27,22.485 20.27,23.25
IVC_SW_1_Sol: J1.4 J3.03 U12.3 | length 46
  Top Layer w0.254: v1(40.775,33.4) 40.786,33.411 42.289,33.411 U12.3@42.3,33.423 ; v1(59.775,36.725) 60.715,35.785 61.824,35.785 ; J1.4@68.291,36.975 68.316,36.95 70.1,36.95 v1(70.125,36.925)
  Layer 1 w0.254: v1(59.775,36.725) 61.94,36.725 64.387,39.172 66.321,39.172 68.568,36.925 v1(70.125,36.925)
  Bottom Layer w0.254: v1(40.775,33.4) 40.197,32.822 40.197,32.207 40.576,31.828 41.112,31.828 41.947,32.663 41.947,33.957 44.653,36.663 51.541,36.663 53.516,38.638 57.841,38.638 59.754,36.725 v1(59.775,36.725) 59.775,36.704 60.694,35.785 J3.03@61.723,35.785
IVC_SW_2_Sol: J1.3 J3.01 U12.2 | length 40.1
  Top Layer w0.254: v1(40.844,32.475) 41.119,32.75 42.263,32.75 U12.2@42.3,32.788 ; 61.824,37.055 62.059,37.055 62.3,37.296 v1(62.3,38) ; J1.3@68.291,37.975 68.304,37.962 70.063,37.962 v1(70.075,37.95)
  Layer 1 w0.254: v1(62.3,38) 63.853,39.553 66.479,39.553 68.082,37.95 v1(70.075,37.95)
  Bottom Layer w0.254: v1(40.844,32.475) 40.844,32.554 41.566,33.276 41.566,34.166 44.444,37.044 51.383,37.044 53.358,39.019 58.73,39.019 60.694,37.055 62.059,37.055 62.3,37.296 v1(62.3,38)
IVC_SW_IN: K2.3 U14.2 | length 16.2
  Top Layer w0.5: K2.3@22.81,25 22.887,25.077 22.887,26.137 23,26.25 24.5,27.75 28.5,27.75 31.06,25.19 U14.2@36.175,25.19
MMCX_Testcon: J17.1 J_ACF.2 J_IVC.2 J_TIA.2 | length 10.2
  Top Layer w0.6: J17.1@8.075,67.975 10.076,67.975 10.926,68.825 11.275,68.825 14.825,68.825 17.925,68.825
NEG_SW: R38.2 R69.2 U2.22
NetC00_2: C00.2 R0.1 R33.1 TP7.1
NetC3_2: C3.2 R15.2 U3.8 | length 6.7
  Bottom Layer w0.3: C3.2@45.3,41.575 45.7,41.175 48.304,41.175 48.404,41.075 48.449,41.075 48.777,40.747 48.777,40.225 48.373,39.821 48.373,39.199 48.549,39.023 49.102,39.023 R15.2@49.325,38.8
NetC6_2: C6.2 C14.2 L1.1 U4.1 U4.3 U7.5
NetC10_2: C10.2 R21.2 R22.2 U5.5 | length 4.7
  Bottom Layer w0.3: U5.5@53.025,32.4 53.138,32.4 53.175,32.437 R22.2@53.175,35.45 ; R21.2@53.375,33.95 53.4,33.925 54.9,33.925 C10.2@54.925,33.9
NetC11_2: C11.2 R23.1 R24.2 U5.3 | length 6.4
  Bottom Layer w0.3: U5.3@47.375,31.75 48.023,31.75 48.575,32.302 C11.2@48.575,33.925 ; R24.2@48.525,35.7 48.55,35.675 48.55,33.95 C11.2@48.575,33.925 ; R23.1@50.1,33.975 50.075,33.95 48.6,33.95 C11.2@48.575,33.925
NetC15_1: C15.1 L1.2 U7.1 | length 4.2
  Bottom Layer w0.75: U7.1@52.75,6.975 52.712,6.937 52.712,4.862 C15.1@52.675,4.825 54,4.825 54.225,4.6 L1.2@54.225,4.175
NetC15_2: C15.2 D1.2 L2.1 | length 6
  Bottom Layer w0.75: D1.2@48.12,7.15 48.145,7.15 48.975,6.32 L2.1@48.975,4.1 48.975,4.6 49.2,4.825 C15.2@50.975,4.825
NetC16_2: C16.2 R29.1 R30.2 U7.3 | length 15.6
  Bottom Layer w0.3: R29.1@44.575,7.65 44.925,8 45.825,8 47,9.175 C16.2@47,9.55 51.875,9.55 52.55,8.875 U7.3@52.75,8.875 52.9,9.025 53.125,9.025 53.552,9.452 56.085,9.452 56.846,8.69 R30.2@56.846,7.25
NetC17_1: C17.1 R30.1 R31.2 | length 3.6
  Bottom Layer w0.75: R31.2@58.25,5.225 58.25,5.525 57.804,5.971 R30.1@57.804,7.25 C17.1@59.225,7.25
NetC21_1: C21.1 R32.1 U8.8 | length 4.8
  Bottom Layer w0.3: R32.1@33.936,5.8 33.886,5.8 33.536,5.45 33.536,5.4 33.384,5.247 33.384,4.1 33.725,3.759 33.725,3.75 34.041,3.434 34.05,3.434 C21.1@34.05,3.425 ; C21.1@34.05,3.225 C21.1@34.05,3.425 ; U8.8@35.484,4.075 34.798,4.075 34.578,3.855 34.551,3.855 34.446,3.75 34.375,3.75 C21.1@34.05,3.425
NetC24_1: C24.1 U10.5
NetC32_2: C32.2 R35.1 R49.1 R50.2 RT1.2
NetD2_2: D2.2 R18.1 | length 1.2
  Top Layer w0.5: R18.1@33.95,-6.25 33.95,-5.046
NetJ6_3: J6.3 R34.1 R47.1 R48.2 | length 29.7
  Top Layer w0.254: 42.3,35.963 42.324,35.987 43.312,35.987 44.275,36.95 49.397,36.95 51.365,38.918 52.218,38.918 56.1,42.8 56.1,44.979 54.66,46.419 54.66,46.829 52.279,49.21
  Top Layer w0.3: 34.75,39.686 34.75,37.25 35.983,36.018 36.845,36.018 36.9,35.963
NetJ7_1: J7.1 R49.2 | length 70.1
  Top Layer w0.254: v1(29.2,41.525) 29.2,41.45 29.953,40.697 32.753,40.697 v1(32.775,40.675) ; v1(31.775,9.7) 33.226,9.7 38.607,4.319 62.712,4.319 63.331,3.7 J7.1@63.4,3.7
  Bottom Layer w0.254: 28.878,41.775 29.128,41.525 v1(29.2,41.525) ; v1(31.775,9.7) 32.44,10.365 32.44,12.788 32.175,13.054 32.175,39.371 32.775,39.971 v1(32.775,40.675)
NetJ7_2: J7.2 R47.2 | length 68.7
  Top Layer w0.254: v1(29.25,42.425) 30.325,41.35 v1(31.525,41.35) ; v1(31.375,10.475) 32.99,10.475 38.765,4.7 J7.2@63.4,4.7
  Bottom Layer w0.254: v1(31.375,10.475) 32.059,11.159 32.059,12.094 32.059,12.63 31.794,12.896 31.794,39.529 32.047,39.782 32.047,40.828 v1(31.525,41.35)
NetJ8_1: J8.1 U15.9 | length 18.2
  Top Layer w0.3: U15.9@54.325,26.375 v1(54.325,27.65)
  Bottom Layer w0.3: J8.1@51.6,13.8 53.275,13.8 55.525,16.05 55.525,26.45 v1(54.325,27.65)
NetJ18_1: J18.1 R64.1 R66.1 | length 35
  Top Layer w0.254: v1(58.2,28.1) 58.2,16.275 R64.1@58.3,16.175 ; v1@62.826,43.35 64.377,44.901 64.377,45.052 64.525,45.2 R66.1@64.55,45.2 ; R66.1@64.55,45.195 J18.1@67.38,45.195
  Layer 1 w0.254: v1(58.2,28.1) 58.775,28.675 58.775,28.685 59.297,29.207 59.297,30.318 58.789,30.826 58.789,32.317 58.781,32.325 58.781,39.006 62.759,42.984 62.759,43.284 v1(62.825,43.35)
NetJ_LED_2: J_LED.2 R18.2 | length 1.9
  Top Layer w0.5: R18.2@35.284,-6.375 J_LED.2@37.144,-6.375
NetK1_4: K1.4 K2.4 | length 6.5
  Top Layer w0.5: K2.4@25.35,25 25.37,24.98 25.37,18.52 K1.4@25.39,18.5
NetK3_4: K3.4 K4.4 | length 6.5
  Top Layer w0.5: K4.4@25.35,12 25.37,11.98 25.37,5.52 K3.4@25.39,5.5
NetK5_4: K5.4 K6.4 | length 6.5
  Top Layer w0.5: K6.4@25.31,51 25.33,50.98 25.33,44.52 K5.4@25.35,44.5
NetK7_4: K7.4 K8.4 | length 6.5
  Top Layer w0.5: K8.4@25.35,38 25.37,37.98 25.37,31.52 K7.4@25.39,31.5
NetQ1_1: Q1.1 R36.1 R37.1 | length 3.7
  Bottom Layer w0.3: Q1.1@21.835,22.65 21.86,22.625 23.785,22.625 R36.1@23.81,22.6 R37.1@25.56,22.6
NetQ2_1: Q2.1 R39.1 R40.1 | length 3.7
  Bottom Layer w0.3: Q2.1@21.835,9.65 21.86,9.625 23.785,9.625 R39.1@23.81,9.6 R40.1@25.56,9.6
NetQ3_1: Q3.1 R42.1 R43.1 | length 3.7
  Bottom Layer w0.3: Q3.1@21.795,48.65 21.82,48.625 23.745,48.625 R42.1@23.77,48.6 R43.1@25.52,48.6
NetQ4_1: Q4.1 R19.1 R20.1 | length 3.7
  Bottom Layer w0.3: Q4.1@21.835,35.65 21.86,35.625 23.785,35.625 R19.1@23.81,35.6 R20.1@25.56,35.6
NetR1_2: R1.2 R2.2 U2.18 | length 40.6
  Top Layer w0.3: v1(53.25,53.35) 53.331,53.35 53.406,53.275 53.925,53.275 R1.2@54.275,52.925 54.275,51.975 54.279,51.971 U2.18@54.279,51.021
  Bottom Layer w0.2: v1(53.25,53.35) 55.367,53.35 55.542,53.525 57.55,53.525 61.245,49.83 61.245,47.042 69.31,38.977 70.387,38.977 71.297,38.067 71.297,28.235 71.025,27.963 R2.2@71.025,26.875
NetR3_2: R3.2 R4.2 R59.2 | length 27.7
  Top Layer w0.2: R59.2@59.825,47.15 59.875,47.2 v1(60.625,47.2)
  Bottom Layer w0.2: v1(60.625,47.2) 69.175,38.65 70.252,38.65 70.97,37.932 70.97,28.37 69.65,27.05 69.65,27.025 69.475,26.85 R4.2@69.45,26.85 R3.2@69.45,25.875
NetR5_2: R5.2 U2.10 U12.6 | length 32.1
  Top Layer w0.254: U12.6@42.3,35.328 42.372,35.4 43.264,35.4 44.389,36.525 49.511,36.525 51.523,38.537 52.487,38.537 57,43.05 v1(57,43.95) 57,44.044 57.575,44.619 57.575,45.975 56.888,46.662 56.138,46.662 U2.10@56.129,46.671 ; v1(60.575,42.7) 62.95,40.325 R5.2@64.525,40.325
  Layer 1 w0.254: v1(57,43.95) 58.622,42.328 60.203,42.328 v1(60.575,42.7)
NetR6_2: R6.2 R7.2 R8.1 U2.8 | length 25.4
  Top Layer w0.254: U2.8@54.779,44.821 54.779,44.721 54.8,44.7 v1(55.45,44.7)
  Bottom Layer w0.254: v1(55.45,44.7) 62.4,44.7 69.475,37.625 R7.2@69.475,32.8 69.463,32.788 69.463,31.838 R6.2@69.45,31.825 69.45,31.125 68.7,30.375 R8.1@68.7,30.325
NetR9_2: R9.2 R10.2 U12.4 | length 28.6
  Top Layer w0.254: v1(40.919,34.4) 41.183,34.136 42.222,34.136 U12.4@42.3,34.058
  Bottom Layer w0.254: v1(40.919,34.4) 43.944,37.425 51.225,37.425 53.2,39.4 60.8,39.4 61.6,40.2 R9.2@64.55,40.2 R10.2@65.6,40.2
NetR11_2: R11.2 U2.11 U12.5 | length 28.1
  Top Layer w0.254: U12.5@42.3,34.693 42.378,34.771 43.173,34.771 44.528,36.125 49.65,36.125 51.681,38.156 52.645,38.156 55.664,41.175 58.3,41.175 ; U2.11@56.129,47.171 57.165,47.171 58.3,46.036 58.3,41.175 ; R11.2@59.625,39.85 59.425,40.05 58.3,41.175
NetR12_2: R12.2 R13.2 U2.9 | length 10.2
  Top Layer w0.3: U2.9@56.129,46.171 56.525,46.171 v1(56.525,45.5) ; v1(59.3,42.975) 61.2,41.075 R12.2@61.2,39.775 R13.2@62.525,39.775
  Layer 1 w0.3: v1(56.525,45.5) 58.993,43.032 59.243,43.032 v1(59.3,42.975)
NetR14_2: R14.2 U3.6 | length 2
  Bottom Layer w0.3: U3.6@52.275,40.525 52.3,40.5 54.2,40.5 R14.2@54.225,40.475
NetR16_1: R16.1 R17.2 U3.7 | length 6.4
  Bottom Layer w0.3: R16.1@43.025,41.85 R17.2@43.025,40.35 43.2,40.525 U3.7@47.825,40.525
NetR19_2: R19.2 U17.6
NetR25_1: R25.1 U6.2 | length 3.4
  Bottom Layer w0.3: U6.2@49.825,25.5 49.6,25.5 49.048,26.052 49.048,26.965 49.95,27.867 49.95,27.9 50.05,28 R25.1@50.1,28
NetR25_2: R25.2 R26.2 U5.1 | length 3.6
  Bottom Layer w0.3: U5.1@47.375,30.45 48.012,30.45 48.975,29.487 48.975,29.1 49.075,29 R26.2@49.125,29 R25.2@50.1,29
NetR26_1: R26.1 U6.5 | length 3.6
  Bottom Layer w0.3: U6.5@47.025,25.5 47.25,25.5 47.548,25.798 47.595,25.798 48.621,26.824 48.621,27.142 48.975,27.496 48.975,27.9 49.075,28 R26.1@49.125,28
NetR27_2: R27.2 U6.6 | length 1.8
  Bottom Layer w0.75: U6.6@47.15,26.55 48,27.4 R27.2@48,28
NetR28_2: R28.2 U6.4 | length 4.2
  Bottom Layer w0.75: R28.2@46.15,28 46.023,27.873 46.023,24.989 46.462,24.55 U6.4@47.025,24.55
NetR36_2: R36.2 U17.3
NetR39_2: R39.2 U17.5 | length 43.4
  Bottom Layer w0.254: 29.783,6.624 30.706,7.547 30.706,44.606 34.059,47.959 34.059,48.184 v1(34.125,48.25)
  other v1: 43.95,46.725
NetR42_2: R42.2 U2.19
NetR48_1: R48.1 U2.31 | length 24.1
  Top Layer w0.254: v1(29.825,50.3) 35.475,50.3 40.3,45.475 47.246,45.475 48.442,46.671 U2.31@49.929,46.671
  Bottom Layer w0.254: 29.468,49.003 29.847,49.382 29.847,50.278 v1(29.825,50.3)
NetR50_1: R50.1 U2.32 | length 23.1
  Top Layer w0.254: v1(29.2,49.65) 35.3,49.65 39.825,45.125 40.111,45.125 40.142,45.094 47.404,45.094 48.481,46.171 U2.32@49.929,46.171
NetR52_1: R52.1 R53.1 R54.1 U14.3 | length 6.3
  Top Layer w0.4: R52.1@32.875,22.45 R53.1@32.875,21.446 32.888,21.433 32.888,20.453 R54.1@32.9,20.441 ; R52.1@32.899,22.45 32.899,23.199 33.62,23.92 U14.3@36.175,23.92
NetR52_2: R52.2 U14.4 | length 2.4